# Altium PCB PCB_TestBoard.PcbDoc (part 1 of 2)
Units mil, origin at the board's own origin, x right, y up, seen from the top; angles counter-clockwise.
Board outline 3740.16 x 3346.46 mil, 2 copper layers (Top Layer, Bottom Layer); 100 components, 97 nets, 452 pads, 102 vias.
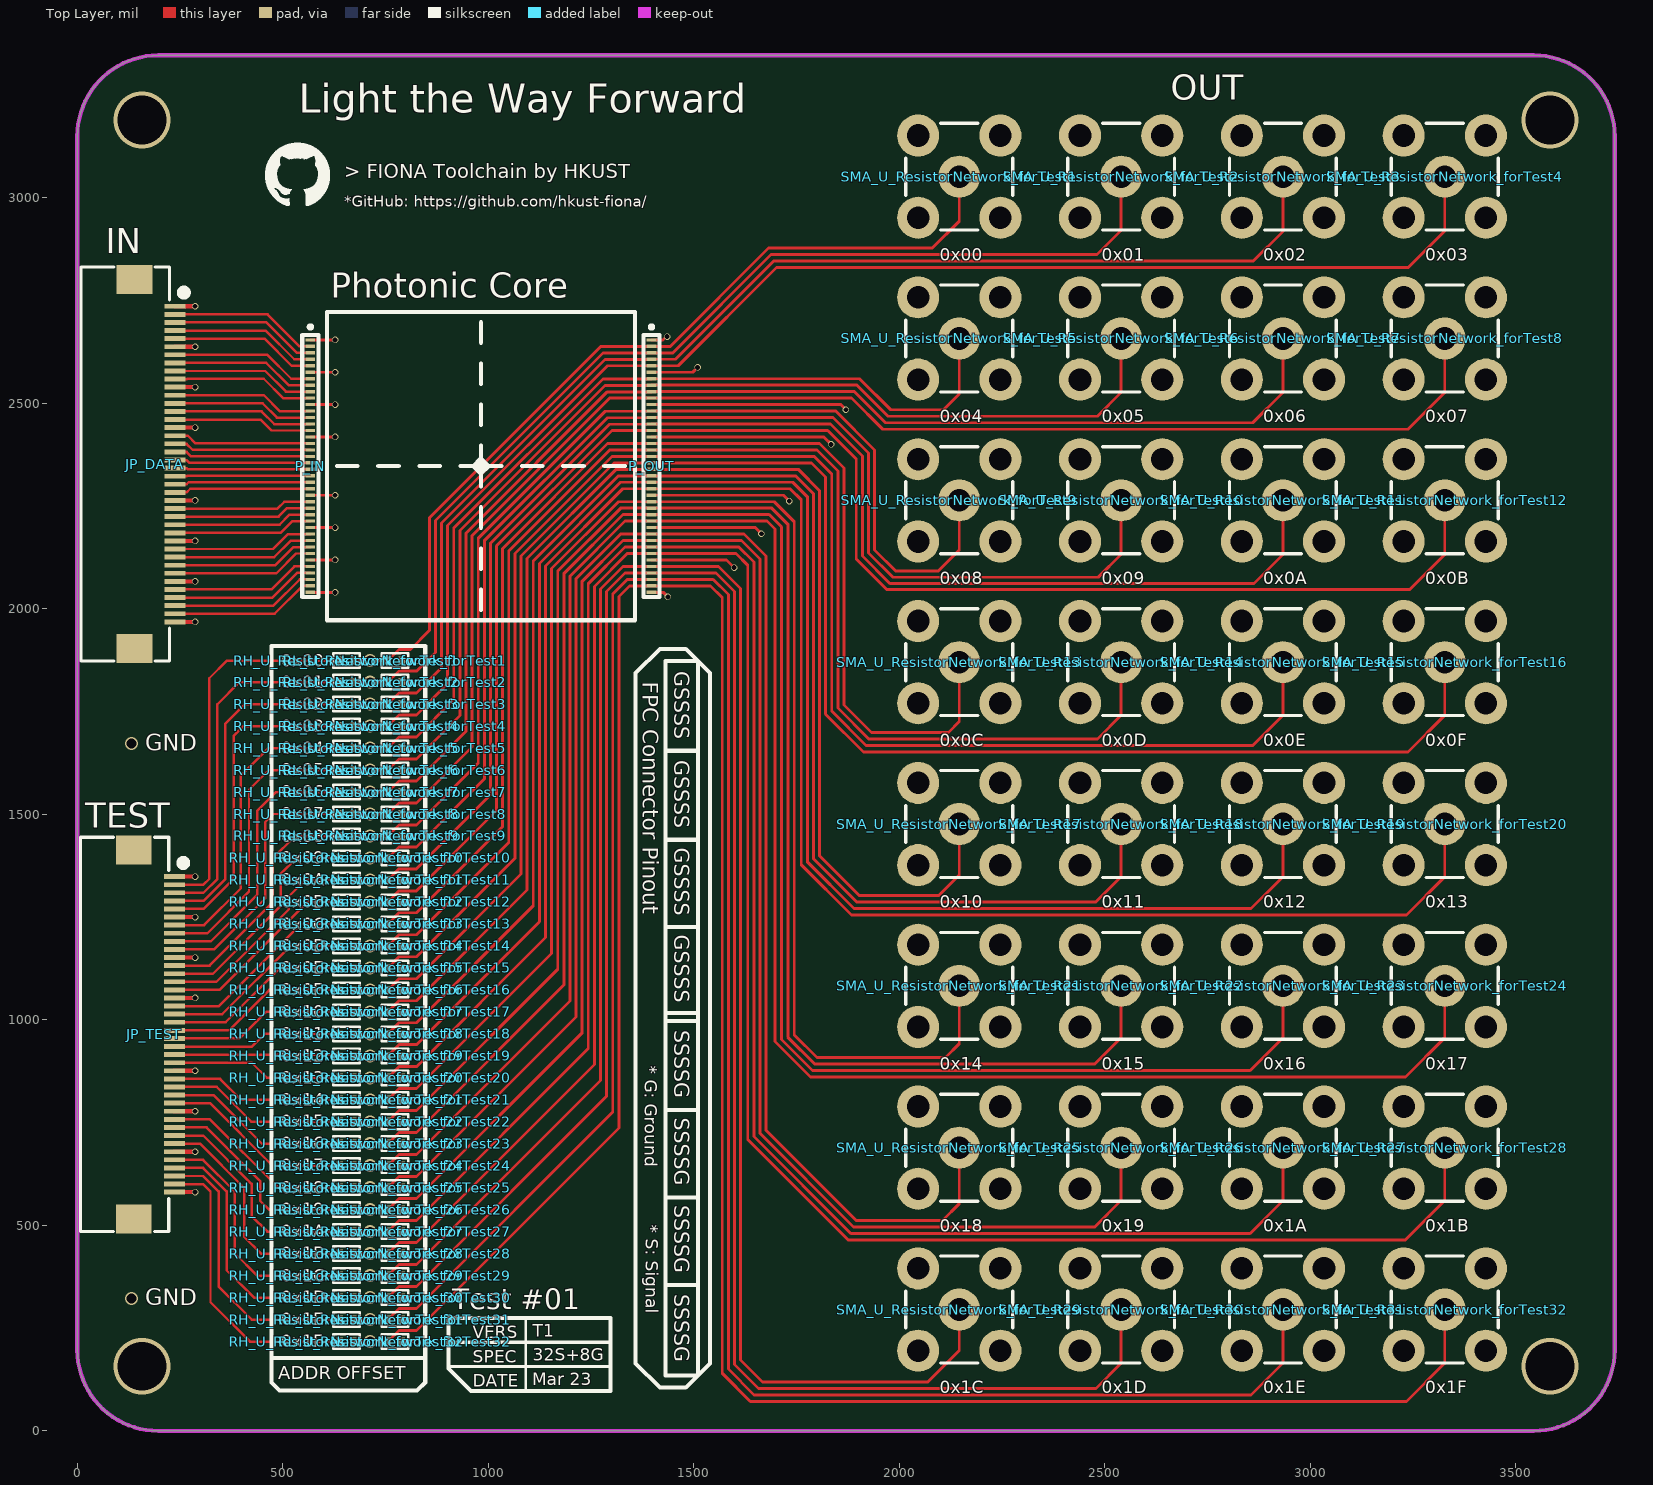
[diagram p0: Top Layer view]
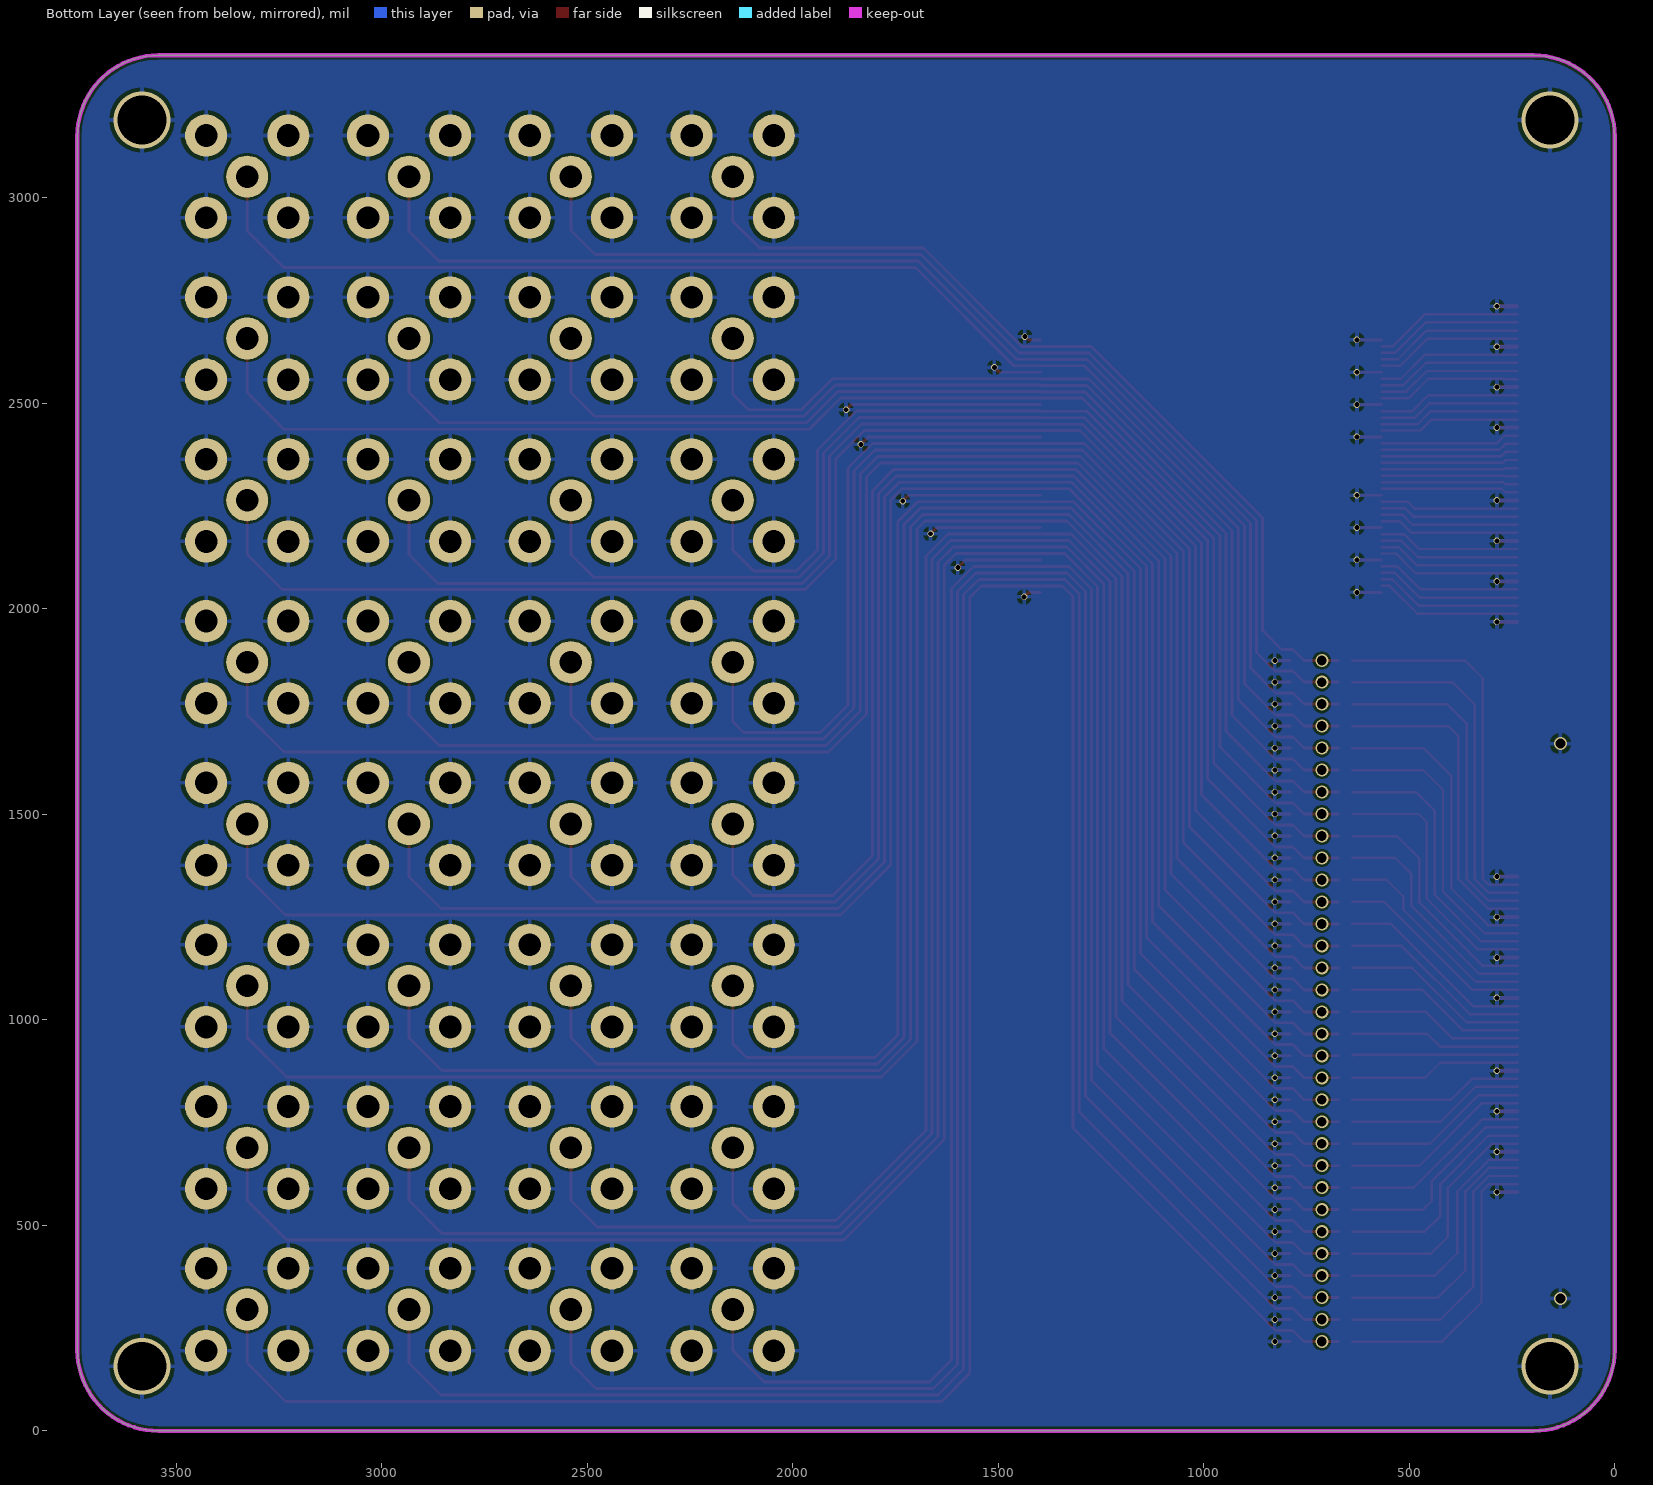
[diagram p1: Bottom Layer view, seen from below]
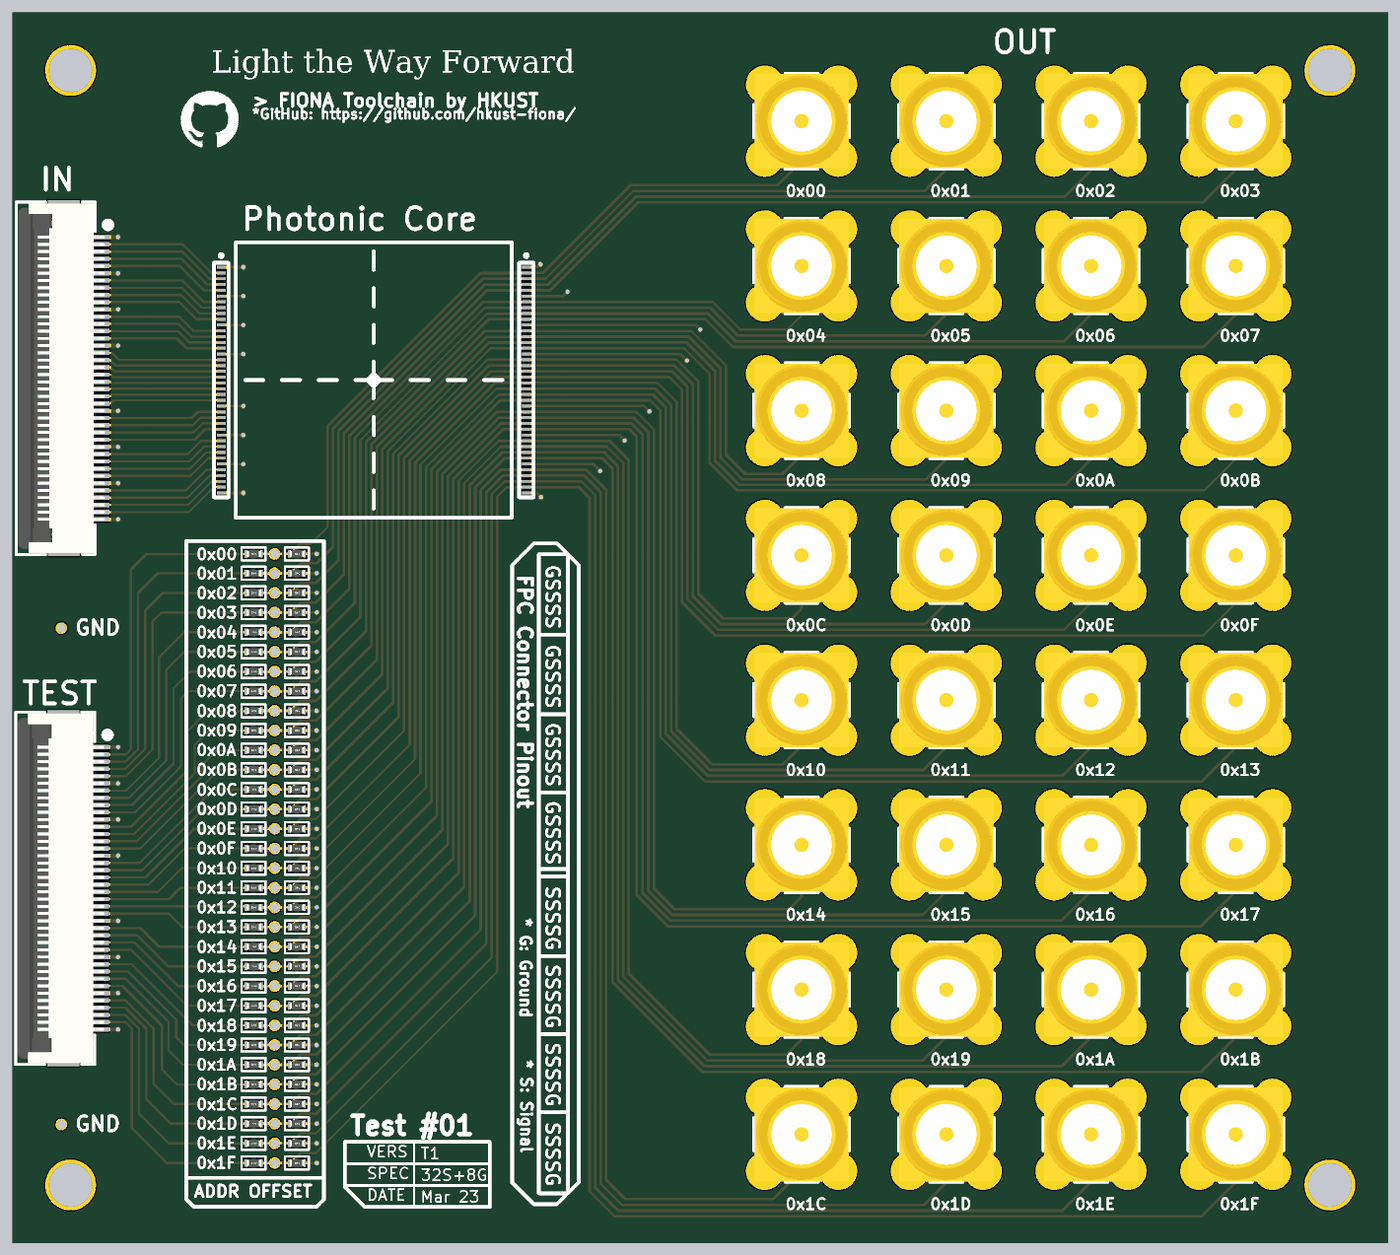
[diagram p3: 3D render of the assembled board from above, using the file's embedded part models]

## Layer stack, top to bottom
Top Solder: solder mask 0.4, Solder Resist, Dk 3.5
Top Layer: signal copper 1.4
Dielectric 1: dielectric 12.6, FR-4, Dk 4.8
Bottom Layer: signal copper 1.4
Bottom Solder: solder mask 0.4, Solder Resist, Dk 3.5

## Board outline
0,196.85 ccw(c196.85,196.85) 196.85,0 3543.31,0 ccw(c3543.31,196.85) 3740.16,196.85 3740.16,3149.61 ccw(c3543.31,3149.61) 3543.31,3346.46 3346.46,3346.46 196.85,3346.46 ccw(c196.85,3149.61) 0,3149.61

## Design rules (kind name [scope] priority, off if disabled: settings)
Clearance Clearance_DataIn [InNetClass('DataIn') vs InNetClass('DataIn')] p1: gap=7.87 ignorepadtopadclearanceinfootprint=FALSE
Clearance Clearance_TestIn [InNetClass('TestIn[1..32]') vs InNetClass('TestIn[1..32]')] p2: gap=7.87 ignorepadtopadclearanceinfootprint=FALSE
Clearance Clearance_Out [InNetClass('Out[1..32]') vs InNetClass('Out[1..32]')] p3: gap=7.87 ignorepadtopadclearanceinfootprint=FALSE
Clearance [All] p4: gap=6 ignorepadtopadclearanceinfootprint=FALSE
HoleSize [All] p1: absolutevalues=TRUE maxlimit=248.03 minlimit=11.81 maxpercent=80.000 minpercent=20.000
PolygonConnect [All] p1: connectstyle=Relief reliefconductorwidth=10 reliefentries=4 polygonreliefangle="90 Angle" airgapwidth=10
RoutingLayers RoutingLayers_DataIn [InNetClass('DataIn')] p1: top layer_v5=TRUE bottom layer_v5=FALSE
RoutingLayers RoutingLayers_TestIn [InNetClass('TestIn[1..32]')] p2: top layer_v5=TRUE bottom layer_v5=FALSE
RoutingLayers [All] p3: top layer_v5=TRUE bottom layer_v5=TRUE
RoutingVias [All] p1: holewidth=11.81 width=15.75 viastyle="Through Hole" minholewidth=11.81 minwidth=15.75 maxholewidth=236.22 maxwidth=236.22
SolderMaskExpansion [All] p1: expansion=4 istentingtop=FALSE
Width Width_DataIn [InNetClass('DataIn')] p1: maxlimit=6 minlimit=6 preferedwidth=6
Width Width_TestIn [InNetClass('TestIn[1..32]')] p2: maxlimit=6 minlimit=6 preferedwidth=6
Width [All] p3: maxlimit=10 minlimit=7 preferedwidth=7
28 further rules are at their usual default settings.

## Classes and differential pairs
net class DataIn: DataIn1 DataIn2 DataIn3 DataIn4 DataIn5 DataIn6 DataIn7 DataIn8 DataIn9 DataIn10 DataIn11 DataIn12 DataIn13 DataIn14 DataIn15 DataIn16 DataIn17 DataIn18 DataIn19 DataIn20 DataIn21 DataIn22 DataIn23 DataIn24 DataIn25 DataIn26 DataIn27 DataIn28 DataIn29 DataIn30 DataIn31 DataIn32
channel class ResistorNetwork_forTest: U_ResistorNetwork_forTest1 U_ResistorNetwork_forTest2 U_ResistorNetwork_forTest3 U_ResistorNetwork_forTest4 U_ResistorNetwork_forTest5 U_ResistorNetwork_forTest6 U_ResistorNetwork_forTest7 U_ResistorNetwork_forTest8 U_ResistorNetwork_forTest9 U_ResistorNetwork_forTest10 U_ResistorNetwork_forTest11 U_ResistorNetwork_forTest12 U_ResistorNetwork_forTest13 U_ResistorNetwork_forTest14 U_ResistorNetwork_forTest15 U_ResistorNetwork_forTest16 U_ResistorNetwork_forTest17 U_ResistorNetwork_forTest18 U_ResistorNetwork_forTest19 U_ResistorNetwork_forTest20 U_ResistorNetwork_forTest21 U_ResistorNetwork_forTest22 U_ResistorNetwork_forTest23 U_ResistorNetwork_forTest24 U_ResistorNetwork_forTest25 U_ResistorNetwork_forTest26 U_ResistorNetwork_forTest27 U_ResistorNetwork_forTest28 U_ResistorNetwork_forTest29 U_ResistorNetwork_forTest30 U_ResistorNetwork_forTest31 U_ResistorNetwork_forTest32
net class TestIn[1..32]: TestIn1 TestIn2 TestIn3 TestIn4 TestIn5 TestIn6 TestIn7 TestIn8 TestIn9 TestIn10 TestIn11 TestIn12 TestIn13 TestIn14 TestIn15 TestIn16 TestIn17 TestIn18 TestIn19 TestIn20 TestIn21 TestIn22 TestIn23 TestIn24 TestIn25 TestIn26 TestIn27 TestIn28 TestIn29 TestIn30 TestIn31 TestIn32
net class Out[1..32]: Out1 Out2 Out3 Out4 Out5 Out6 Out7 Out8 Out9 Out10 Out11 Out12 Out13 Out14 Out15 Out16 Out17 Out18 Out19 Out20 Out21 Out22 Out23 Out24 Out25 Out26 Out27 Out28 Out29 Out30 Out31 Out32
component class U_ResistorNetwork_forTest32: RH_U_ResistorNetwork_forTest32 RL_U_ResistorNetwork_forTest32 SMA_U_ResistorNetwork_forTest32
component class U_ResistorNetwork_forTest31: RH_U_ResistorNetwork_forTest31 RL_U_ResistorNetwork_forTest31 SMA_U_ResistorNetwork_forTest31
component class U_ResistorNetwork_forTest30: RH_U_ResistorNetwork_forTest30 RL_U_ResistorNetwork_forTest30 SMA_U_ResistorNetwork_forTest30
component class U_ResistorNetwork_forTest29: RH_U_ResistorNetwork_forTest29 RL_U_ResistorNetwork_forTest29 SMA_U_ResistorNetwork_forTest29
component class U_ResistorNetwork_forTest28: RH_U_ResistorNetwork_forTest28 RL_U_ResistorNetwork_forTest28 SMA_U_ResistorNetwork_forTest28
component class U_ResistorNetwork_forTest27: RH_U_ResistorNetwork_forTest27 RL_U_ResistorNetwork_forTest27 SMA_U_ResistorNetwork_forTest27
component class U_ResistorNetwork_forTest26: RH_U_ResistorNetwork_forTest26 RL_U_ResistorNetwork_forTest26 SMA_U_ResistorNetwork_forTest26
component class U_ResistorNetwork_forTest25: RH_U_ResistorNetwork_forTest25 RL_U_ResistorNetwork_forTest25 SMA_U_ResistorNetwork_forTest25
component class U_ResistorNetwork_forTest24: RH_U_ResistorNetwork_forTest24 RL_U_ResistorNetwork_forTest24 SMA_U_ResistorNetwork_forTest24
component class U_ResistorNetwork_forTest23: RH_U_ResistorNetwork_forTest23 RL_U_ResistorNetwork_forTest23 SMA_U_ResistorNetwork_forTest23
component class U_ResistorNetwork_forTest22: RH_U_ResistorNetwork_forTest22 RL_U_ResistorNetwork_forTest22 SMA_U_ResistorNetwork_forTest22
component class U_ResistorNetwork_forTest21: RH_U_ResistorNetwork_forTest21 RL_U_ResistorNetwork_forTest21 SMA_U_ResistorNetwork_forTest21
component class U_ResistorNetwork_forTest20: RH_U_ResistorNetwork_forTest20 RL_U_ResistorNetwork_forTest20 SMA_U_ResistorNetwork_forTest20
component class U_ResistorNetwork_forTest19: RH_U_ResistorNetwork_forTest19 RL_U_ResistorNetwork_forTest19 SMA_U_ResistorNetwork_forTest19
component class U_ResistorNetwork_forTest18: RH_U_ResistorNetwork_forTest18 RL_U_ResistorNetwork_forTest18 SMA_U_ResistorNetwork_forTest18
component class U_ResistorNetwork_forTest17: RH_U_ResistorNetwork_forTest17 RL_U_ResistorNetwork_forTest17 SMA_U_ResistorNetwork_forTest17
component class U_ResistorNetwork_forTest16: RH_U_ResistorNetwork_forTest16 RL_U_ResistorNetwork_forTest16 SMA_U_ResistorNetwork_forTest16
component class U_ResistorNetwork_forTest15: RH_U_ResistorNetwork_forTest15 RL_U_ResistorNetwork_forTest15 SMA_U_ResistorNetwork_forTest15
component class U_ResistorNetwork_forTest14: RH_U_ResistorNetwork_forTest14 RL_U_ResistorNetwork_forTest14 SMA_U_ResistorNetwork_forTest14
component class U_ResistorNetwork_forTest13: RH_U_ResistorNetwork_forTest13 RL_U_ResistorNetwork_forTest13 SMA_U_ResistorNetwork_forTest13
component class U_ResistorNetwork_forTest12: RH_U_ResistorNetwork_forTest12 RL_U_ResistorNetwork_forTest12 SMA_U_ResistorNetwork_forTest12
component class U_ResistorNetwork_forTest11: RH_U_ResistorNetwork_forTest11 RL_U_ResistorNetwork_forTest11 SMA_U_ResistorNetwork_forTest11
component class U_ResistorNetwork_forTest10: RH_U_ResistorNetwork_forTest10 RL_U_ResistorNetwork_forTest10 SMA_U_ResistorNetwork_forTest10
component class U_ResistorNetwork_forTest9: RH_U_ResistorNetwork_forTest9 RL_U_ResistorNetwork_forTest9 SMA_U_ResistorNetwork_forTest9
component class U_ResistorNetwork_forTest8: RH_U_ResistorNetwork_forTest8 RL_U_ResistorNetwork_forTest8 SMA_U_ResistorNetwork_forTest8
component class U_ResistorNetwork_forTest7: RH_U_ResistorNetwork_forTest7 RL_U_ResistorNetwork_forTest7 SMA_U_ResistorNetwork_forTest7
component class U_ResistorNetwork_forTest6: RH_U_ResistorNetwork_forTest6 RL_U_ResistorNetwork_forTest6 SMA_U_ResistorNetwork_forTest6
component class U_ResistorNetwork_forTest5: RH_U_ResistorNetwork_forTest5 RL_U_ResistorNetwork_forTest5 SMA_U_ResistorNetwork_forTest5
component class U_ResistorNetwork_forTest4: RH_U_ResistorNetwork_forTest4 RL_U_ResistorNetwork_forTest4 SMA_U_ResistorNetwork_forTest4
component class U_ResistorNetwork_forTest3: RH_U_ResistorNetwork_forTest3 RL_U_ResistorNetwork_forTest3 SMA_U_ResistorNetwork_forTest3
component class U_ResistorNetwork_forTest2: RH_U_ResistorNetwork_forTest2 RL_U_ResistorNetwork_forTest2 SMA_U_ResistorNetwork_forTest2
component class U_ResistorNetwork_forTest1: RH_U_ResistorNetwork_forTest1 RL_U_ResistorNetwork_forTest1 SMA_U_ResistorNetwork_forTest1
component class TrayBoard: JP_DATA JP_TEST P_IN P_OUT

## Components (designator, comment, footprint, x,y, rotation, side; value= is the part's Value field where it differs from the comment)
JP_DATA "FPC-0.5mm-40P" "FPC0.5 2H-WS-40P" 139.21,2352.05 r270 top
JP_TEST "FPC-0.5mm-40P" "FPC0.5 2H-WS-40P" 137.8,964.57 r270 top
P_IN "SMD 40P" SMD-40P-W0.2-H0.6-T0.4 567.09,2347.05 r270 top
P_OUT "SMD 40P" SMD-40P-W0.2-H0.6-T0.4 1397.09,2347.05 r270 top
RH_U_ResistorNetwork_forTest1 "5K" "R 0402_L" 656.22,1874.01 r180 top (schematic designator RH)
RH_U_ResistorNetwork_forTest2 "5K" "R 0402_L" 656.22,1821.53 r180 top (schematic designator RH)
RH_U_ResistorNetwork_forTest3 "5K" "R 0402_L" 656.22,1768.06 r180 top (schematic designator RH)
RH_U_ResistorNetwork_forTest4 "5K" "R 0402_L" 656.22,1714.58 r180 top (schematic designator RH)
RH_U_ResistorNetwork_forTest5 "5K" "R 0402_L" 656.22,1661.11 r180 top (schematic designator RH)
RH_U_ResistorNetwork_forTest6 "5K" "R 0402_L" 656.22,1607.63 r180 top (schematic designator RH)
RH_U_ResistorNetwork_forTest7 "5K" "R 0402_L" 656.22,1554.16 r180 top (schematic designator RH)
RH_U_ResistorNetwork_forTest8 "5K" "R 0402_L" 656.22,1500.69 r180 top (schematic designator RH)
RH_U_ResistorNetwork_forTest9 "5K" "R 0402_L" 656.22,1447.21 r180 top (schematic designator RH)
RH_U_ResistorNetwork_forTest10 "5K" "R 0402_L" 656.22,1393.74 r180 top (schematic designator RH)
RH_U_ResistorNetwork_forTest11 "5K" "R 0402_L" 656.22,1340.27 r180 top (schematic designator RH)
RH_U_ResistorNetwork_forTest12 "5K" "R 0402_L" 656.22,1286.79 r180 top (schematic designator RH)
RH_U_ResistorNetwork_forTest13 "5K" "R 0402_L" 656.22,1233.32 r180 top (schematic designator RH)
RH_U_ResistorNetwork_forTest14 "5K" "R 0402_L" 656.22,1179.84 r180 top (schematic designator RH)
RH_U_ResistorNetwork_forTest15 "5K" "R 0402_L" 656.22,1126.37 r180 top (schematic designator RH)
RH_U_ResistorNetwork_forTest16 "5K" "R 0402_L" 656.22,1072.9 r180 top (schematic designator RH)
RH_U_ResistorNetwork_forTest17 "5K" "R 0402_L" 656.22,1019.42 r180 top (schematic designator RH)
RH_U_ResistorNetwork_forTest18 "5K" "R 0402_L" 656.22,965.95 r180 top (schematic designator RH)
RH_U_ResistorNetwork_forTest19 "5K" "R 0402_L" 656.22,912.47 r180 top (schematic designator RH)
RH_U_ResistorNetwork_forTest20 "5K" "R 0402_L" 656.22,859 r180 top (schematic designator RH)
RH_U_ResistorNetwork_forTest21 "5K" "R 0402_L" 656.22,805.53 r180 top (schematic designator RH)
RH_U_ResistorNetwork_forTest22 "5K" "R 0402_L" 656.22,752.05 r180 top (schematic designator RH)
RH_U_ResistorNetwork_forTest23 "5K" "R 0402_L" 656.22,698.58 r180 top (schematic designator RH)
RH_U_ResistorNetwork_forTest24 "5K" "R 0402_L" 656.22,645.1 r180 top (schematic designator RH)
RH_U_ResistorNetwork_forTest25 "5K" "R 0402_L" 656.22,591.63 r180 top (schematic designator RH)
RH_U_ResistorNetwork_forTest26 "5K" "R 0402_L" 656.22,538.16 r180 top (schematic designator RH)
RH_U_ResistorNetwork_forTest27 "5K" "R 0402_L" 656.22,484.68 r180 top (schematic designator RH)
RH_U_ResistorNetwork_forTest28 "5K" "R 0402_L" 656.22,431.21 r180 top (schematic designator RH)
RH_U_ResistorNetwork_forTest29 "5K" "R 0402_L" 656.22,377.74 r180 top (schematic designator RH)
RH_U_ResistorNetwork_forTest30 "5K" "R 0402_L" 656.22,324.26 r180 top (schematic designator RH)
RH_U_ResistorNetwork_forTest31 "5K" "R 0402_L" 656.22,270.79 r180 top (schematic designator RH)
RH_U_ResistorNetwork_forTest32 "5K" "R 0402_L" 656.22,217.31 r180 top (schematic designator RH)
RL_U_ResistorNetwork_forTest1 "1K" "R 0402_L" 773.62,1874.01 r180 top (schematic designator RL)
RL_U_ResistorNetwork_forTest2 "1K" "R 0402_L" 773.62,1821.53 r180 top (schematic designator RL)
RL_U_ResistorNetwork_forTest3 "1K" "R 0402_L" 773.62,1768.06 r180 top (schematic designator RL)
RL_U_ResistorNetwork_forTest4 "1K" "R 0402_L" 773.62,1714.58 r180 top (schematic designator RL)
RL_U_ResistorNetwork_forTest5 "1K" "R 0402_L" 773.62,1661.11 r180 top (schematic designator RL)
RL_U_ResistorNetwork_forTest6 "1K" "R 0402_L" 773.62,1607.64 r180 top (schematic designator RL)
RL_U_ResistorNetwork_forTest7 "1K" "R 0402_L" 773.62,1554.16 r180 top (schematic designator RL)
RL_U_ResistorNetwork_forTest8 "1K" "R 0402_L" 773.62,1500.69 r180 top (schematic designator RL)
RL_U_ResistorNetwork_forTest9 "1K" "R 0402_L" 773.62,1447.21 r180 top (schematic designator RL)
RL_U_ResistorNetwork_forTest10 "1K" "R 0402_L" 773.62,1393.74 r180 top (schematic designator RL)
RL_U_ResistorNetwork_forTest11 "1K" "R 0402_L" 773.62,1340.27 r180 top (schematic designator RL)
RL_U_ResistorNetwork_forTest12 "1K" "R 0402_L" 773.62,1286.79 r180 top (schematic designator RL)
RL_U_ResistorNetwork_forTest13 "1K" "R 0402_L" 773.62,1233.32 r180 top (schematic designator RL)
RL_U_ResistorNetwork_forTest14 "1K" "R 0402_L" 773.62,1179.84 r180 top (schematic designator RL)
RL_U_ResistorNetwork_forTest15 "1K" "R 0402_L" 773.62,1126.37 r180 top (schematic designator RL)
RL_U_ResistorNetwork_forTest16 "1K" "R 0402_L" 773.62,1072.9 r180 top (schematic designator RL)
RL_U_ResistorNetwork_forTest17 "1K" "R 0402_L" 773.62,1019.42 r180 top (schematic designator RL)
RL_U_ResistorNetwork_forTest18 "1K" "R 0402_L" 773.62,965.95 r180 top (schematic designator RL)
RL_U_ResistorNetwork_forTest19 "1K" "R 0402_L" 773.62,912.47 r180 top (schematic designator RL)
RL_U_ResistorNetwork_forTest20 "1K" "R 0402_L" 773.62,859 r180 top (schematic designator RL)
RL_U_ResistorNetwork_forTest21 "1K" "R 0402_L" 773.62,805.53 r180 top (schematic designator RL)
RL_U_ResistorNetwork_forTest22 "1K" "R 0402_L" 773.62,752.05 r180 top (schematic designator RL)
RL_U_ResistorNetwork_forTest23 "1K" "R 0402_L" 773.62,698.58 r180 top (schematic designator RL)
RL_U_ResistorNetwork_forTest24 "1K" "R 0402_L" 773.62,645.11 r180 top (schematic designator RL)
RL_U_ResistorNetwork_forTest25 "1K" "R 0402_L" 773.62,591.63 r180 top (schematic designator RL)
RL_U_ResistorNetwork_forTest26 "1K" "R 0402_L" 773.62,538.16 r180 top (schematic designator RL)
RL_U_ResistorNetwork_forTest27 "1K" "R 0402_L" 773.62,484.68 r180 top (schematic designator RL)
RL_U_ResistorNetwork_forTest28 "1K" "R 0402_L" 773.62,431.21 r180 top (schematic designator RL)
RL_U_ResistorNetwork_forTest29 "1K" "R 0402_L" 773.62,377.74 r180 top (schematic designator RL)
RL_U_ResistorNetwork_forTest30 "1K" "R 0402_L" 773.62,324.26 r180 top (schematic designator RL)
RL_U_ResistorNetwork_forTest31 "1K" "R 0402_L" 773.62,270.79 r180 top (schematic designator RL)
RL_U_ResistorNetwork_forTest32 "1K" "R 0402_L" 773.62,217.31 r180 top (schematic designator RL)
SMA_U_ResistorNetwork_forTest1 "SMA RF 立式" SMA-KE-LI 2145.67,3051.18 r270 top (schematic designator SMA)
SMA_U_ResistorNetwork_forTest2 "SMA RF 立式" SMA-KE-LI 2539.37,3051.18 r270 top (schematic designator SMA)
SMA_U_ResistorNetwork_forTest3 "SMA RF 立式" SMA-KE-LI 2933.07,3051.18 r270 top (schematic designator SMA)
SMA_U_ResistorNetwork_forTest4 "SMA RF 立式" SMA-KE-LI 3326.77,3051.18 r270 top (schematic designator SMA)
SMA_U_ResistorNetwork_forTest5 "SMA RF 立式" SMA-KE-LI 2145.67,2657.48 r270 top (schematic designator SMA)
SMA_U_ResistorNetwork_forTest6 "SMA RF 立式" SMA-KE-LI 2539.37,2657.48 r270 top (schematic designator SMA)
SMA_U_ResistorNetwork_forTest7 "SMA RF 立式" SMA-KE-LI 2933.07,2657.48 r270 top (schematic designator SMA)
SMA_U_ResistorNetwork_forTest8 "SMA RF 立式" SMA-KE-LI 3326.77,2657.48 r270 top (schematic designator SMA)
SMA_U_ResistorNetwork_forTest9 "SMA RF 立式" SMA-KE-LI 2145.67,2263.78 r270 top (schematic designator SMA)
SMA_U_ResistorNetwork_forTest10 "SMA RF 立式" SMA-KE-LI 2539.37,2263.78 r270 top (schematic designator SMA)
SMA_U_ResistorNetwork_forTest11 "SMA RF 立式" SMA-KE-LI 2933.07,2263.78 r270 top (schematic designator SMA)
SMA_U_ResistorNetwork_forTest12 "SMA RF 立式" SMA-KE-LI 3326.77,2263.78 r270 top (schematic designator SMA)
SMA_U_ResistorNetwork_forTest13 "SMA RF 立式" SMA-KE-LI 2145.67,1870.08 r270 top (schematic designator SMA)
SMA_U_ResistorNetwork_forTest14 "SMA RF 立式" SMA-KE-LI 2539.37,1870.08 r270 top (schematic designator SMA)
SMA_U_ResistorNetwork_forTest15 "SMA RF 立式" SMA-KE-LI 2933.07,1870.08 r270 top (schematic designator SMA)
SMA_U_ResistorNetwork_forTest16 "SMA RF 立式" SMA-KE-LI 3326.77,1870.08 r270 top (schematic designator SMA)
SMA_U_ResistorNetwork_forTest17 "SMA RF 立式" SMA-KE-LI 2145.67,1476.38 r270 top (schematic designator SMA)
SMA_U_ResistorNetwork_forTest18 "SMA RF 立式" SMA-KE-LI 2539.37,1476.38 r270 top (schematic designator SMA)
SMA_U_ResistorNetwork_forTest19 "SMA RF 立式" SMA-KE-LI 2933.07,1476.38 r270 top (schematic designator SMA)
SMA_U_ResistorNetwork_forTest20 "SMA RF 立式" SMA-KE-LI 3326.77,1476.38 r270 top (schematic designator SMA)
SMA_U_ResistorNetwork_forTest21 "SMA RF 立式" SMA-KE-LI 2145.67,1082.68 r270 top (schematic designator SMA)
SMA_U_ResistorNetwork_forTest22 "SMA RF 立式" SMA-KE-LI 2539.37,1082.68 r270 top (schematic designator SMA)
SMA_U_ResistorNetwork_forTest23 "SMA RF 立式" SMA-KE-LI 2933.07,1082.68 r270 top (schematic designator SMA)
SMA_U_ResistorNetwork_forTest24 "SMA RF 立式" SMA-KE-LI 3326.77,1082.68 r270 top (schematic designator SMA)
SMA_U_ResistorNetwork_forTest25 "SMA RF 立式" SMA-KE-LI 2145.67,688.98 r270 top (schematic designator SMA)
SMA_U_ResistorNetwork_forTest26 "SMA RF 立式" SMA-KE-LI 2539.37,688.98 r270 top (schematic designator SMA)
SMA_U_ResistorNetwork_forTest27 "SMA RF 立式" SMA-KE-LI 2933.07,688.98 r270 top (schematic designator SMA)
SMA_U_ResistorNetwork_forTest28 "SMA RF 立式" SMA-KE-LI 3326.77,688.98 r270 top (schematic designator SMA)
SMA_U_ResistorNetwork_forTest29 "SMA RF 立式" SMA-KE-LI 2145.67,295.28 r270 top (schematic designator SMA)
SMA_U_ResistorNetwork_forTest30 "SMA RF 立式" SMA-KE-LI 2539.37,295.28 r270 top (schematic designator SMA)
SMA_U_ResistorNetwork_forTest31 "SMA RF 立式" SMA-KE-LI 2933.07,295.28 r270 top (schematic designator SMA)
SMA_U_ResistorNetwork_forTest32 "SMA RF 立式" SMA-KE-LI 3326.77,295.28 r270 top (schematic designator SMA)

## Footprints (in the part's own frame and the unit in brackets; to place one, negate y for a bottom-side part, rotate by r counter-clockwise, add the part's x,y. Pads: shape width x height; smd on the part's side, far side on the other; paste and mask are expansions set on the pad)
"FPC0.5 2H-WS-40P" [mm] "长：24.2mm，宽：5.2mm，高：2mm 淘宝ID:黄晶宝石   店铺网址:https://shop463601444.taobao.com"
  rect 1.8x2.2 smd: 0(-11.4,0) 0(11.4,0)
  rect 0.3x1.3 smd: 1(-9.75,2.497) 2(-9.25,2.497) 3(-8.75,2.497) 4(-8.25,2.497) 5(-7.75,2.497) 6(-7.25,2.497) 7(-6.75,2.497) 8(-6.25,2.497) 9(-5.75,2.497) 10(-5.25,2.497) 11(-4.75,2.497) 12(-4.25,2.497) 13(-3.75,2.497) 14(-3.25,2.497) 15(-2.75,2.497) 16(-2.25,2.497) 17(-1.75,2.497) 18(-1.25,2.497) 19(-0.75,2.497) 20(-0.25,2.497) 21(0.25,2.497) 22(0.75,2.497) 23(1.25,2.497) 24(1.75,2.497) 25(2.25,2.497) 26(2.75,2.497) 27(3.25,2.497) 28(3.75,2.497) 29(4.25,2.497) 30(4.75,2.497) 31(5.25,2.497) 32(5.75,2.497) 33(6.25,2.497) 34(6.75,2.497) 35(7.25,2.497) 36(7.75,2.497) 37(8.25,2.497) 38(8.75,2.497) 39(9.25,2.497) 40(9.75,2.497)
  silkscreen extent -12.17,-3.3 12.17,3.23, body extent -12.1,-3.15 12.1,2.85, height 2
"R 0402_L" [mm] "1/16W贴片电阻     淘宝ID:黄晶宝石"
  rect 0.4x0.5 smd: 1(-0.4,0) 2(0.45,0)
  silkscreen extent -0.8,-0.45 0.85,0.45, body extent -0.5,-0.25 0.5,0.25, height 0.3
SMA-KE-LI [mm] "SMA 立式直插射频天线座     淘宝ID:黄晶宝石"
  round 2.6 hole 1.4: 1(0,0) 2(-2.54,-2.54) 2(2.54,-2.54) 3(-2.54,2.54) 3(2.54,2.54)
  silkscreen extent -3.3,-3.3 3.3,3.3, body extent -3.25,-3.25 3.25,3.25, height 10.35
SMD-40P-W0.2-H0.6-T0.4 [mm] "SMD 40PIN; Width: 0.2mm, Height: 0.6m, Period: 0.4mm."
  rect 0.2x0.6 smd: 1(-7.8,0) 2(-7.4,0) 3(-7,0) 4(-6.6,0) 5(-6.2,0) 6(-5.8,0) 7(-5.4,0) 8(-5,0) 9(-4.6,0) 10(-4.2,0) 11(-3.8,0) 12(-3.4,0) 13(-3,0) 14(-2.6,0) 15(-2.2,0) 16(-1.8,0) 17(-1.4,0) 18(-1,0) 19(-0.6,0) 20(-0.2,0) 21(0.2,0) 22(0.6,0) 23(1,0) 24(1.4,0) 25(1.8,0) 26(2.2,0) 27(2.6,0) 28(3,0) 29(3.4,0) 30(3.8,0) 31(4.2,0) 32(4.6,0) 33(5,0) 34(5.4,0) 35(5.8,0) 36(6.2,0) 37(6.6,0) 38(7,0) 39(7.4,0) 40(7.8,0)
  silkscreen extent -8.7,-0.5 8.1,0.5

## Part data
JP_DATA JP_TEST: "FPC Connector 0.5mm 40PIN"
P_IN P_OUT: "SMD Pad for Chip Bonding (40 PIN)."
RH_U_ResistorNetwork_forTest1 RH_U_ResistorNetwork_forTest2 RH_U_ResistorNetwork_forTest3 RH_U_ResistorNetwork_forTest4 RH_U_ResistorNetwork_forTest5 RH_U_ResistorNetwork_forTest6 RH_U_ResistorNetwork_forTest7 RH_U_ResistorNetwork_forTest8 RH_U_ResistorNetwork_forTest9 RH_U_ResistorNetwork_forTest10 RH_U_ResistorNetwork_forTest11 RH_U_ResistorNetwork_forTest12 RH_U_ResistorNetwork_forTest13 RH_U_ResistorNetwork_forTest14 RH_U_ResistorNetwork_forTest15 RH_U_ResistorNetwork_forTest16 RH_U_ResistorNetwork_forTest17 RH_U_ResistorNetwork_forTest18 RH_U_ResistorNetwork_forTest19 RH_U_ResistorNetwork_forTest20 RH_U_ResistorNetwork_forTest21 RH_U_ResistorNetwork_forTest22 RH_U_ResistorNetwork_forTest23 RH_U_ResistorNetwork_forTest24 RH_U_ResistorNetwork_forTest25 RH_U_ResistorNetwork_forTest26 RH_U_ResistorNetwork_forTest27 RH_U_ResistorNetwork_forTest28 RH_U_ResistorNetwork_forTest29 RH_U_ResistorNetwork_forTest30 RH_U_ResistorNetwork_forTest31 RH_U_ResistorNetwork_forTest32: library part R, "贴片电阻 0.1% / C3202451", BOM名称=贴片电阻, 封装库来自淘宝卖家 ID：黄晶宝石=其他店铺购入均为盗版，不享受售后技术支持服务，请立即申请退款, 版权归属="来自淘宝 ID：黄晶宝石", 联系售后=https://shop463601444.taobao.com
RL_U_ResistorNetwork_forTest1 RL_U_ResistorNetwork_forTest2 RL_U_ResistorNetwork_forTest3 RL_U_ResistorNetwork_forTest4 RL_U_ResistorNetwork_forTest5 RL_U_ResistorNetwork_forTest6 RL_U_ResistorNetwork_forTest7 RL_U_ResistorNetwork_forTest8 RL_U_ResistorNetwork_forTest9 RL_U_ResistorNetwork_forTest10 RL_U_ResistorNetwork_forTest11 RL_U_ResistorNetwork_forTest12 RL_U_ResistorNetwork_forTest13 RL_U_ResistorNetwork_forTest14 RL_U_ResistorNetwork_forTest15 RL_U_ResistorNetwork_forTest16 RL_U_ResistorNetwork_forTest17 RL_U_ResistorNetwork_forTest18 RL_U_ResistorNetwork_forTest19 RL_U_ResistorNetwork_forTest20 RL_U_ResistorNetwork_forTest21 RL_U_ResistorNetwork_forTest22 RL_U_ResistorNetwork_forTest23 RL_U_ResistorNetwork_forTest24 RL_U_ResistorNetwork_forTest25 RL_U_ResistorNetwork_forTest26 RL_U_ResistorNetwork_forTest27 RL_U_ResistorNetwork_forTest28 RL_U_ResistorNetwork_forTest29 RL_U_ResistorNetwork_forTest30 RL_U_ResistorNetwork_forTest31 RL_U_ResistorNetwork_forTest32: library part R, "贴片电阻 0.1%", BOM名称=贴片电阻, 封装库来自淘宝卖家 ID：黄晶宝石=其他店铺购入均为盗版，不享受售后技术支持服务，请立即申请退款, 版权归属="来自淘宝 ID：黄晶宝石", 联系售后=https://shop463601444.taobao.com
SMA_U_ResistorNetwork_forTest1 SMA_U_ResistorNetwork_forTest2 SMA_U_ResistorNetwork_forTest3 SMA_U_ResistorNetwork_forTest4 SMA_U_ResistorNetwork_forTest5 SMA_U_ResistorNetwork_forTest6 SMA_U_ResistorNetwork_forTest7 SMA_U_ResistorNetwork_forTest8 SMA_U_ResistorNetwork_forTest9 SMA_U_ResistorNetwork_forTest10 SMA_U_ResistorNetwork_forTest11 SMA_U_ResistorNetwork_forTest12 SMA_U_ResistorNetwork_forTest13 SMA_U_ResistorNetwork_forTest14 SMA_U_ResistorNetwork_forTest15 SMA_U_ResistorNetwork_forTest16 SMA_U_ResistorNetwork_forTest17 SMA_U_ResistorNetwork_forTest18 SMA_U_ResistorNetwork_forTest19 SMA_U_ResistorNetwork_forTest20 SMA_U_ResistorNetwork_forTest21 SMA_U_ResistorNetwork_forTest22 SMA_U_ResistorNetwork_forTest23 SMA_U_ResistorNetwork_forTest24 SMA_U_ResistorNetwork_forTest25 SMA_U_ResistorNetwork_forTest26 SMA_U_ResistorNetwork_forTest27 SMA_U_ResistorNetwork_forTest28 SMA_U_ResistorNetwork_forTest29 SMA_U_ResistorNetwork_forTest30 SMA_U_ResistorNetwork_forTest31 SMA_U_ResistorNetwork_forTest32: library part SMA, BOM名称=SMA-2.4G射频天线接口, 唯一出售店铺网址=https://shop463601444.taobao.com, 版权归属="封装库来自淘宝 ID：黄晶宝石"

## Via types
v1: diameter 15.75, hole 11.81, Top Layer to Bottom Layer, tented both sides, 64 vias
v2: diameter 31.5, hole 23.62, Top Layer to Bottom Layer, 34 vias
v3: diameter 137.8, hole 118.11, Top Layer to Bottom Layer, 4 vias

## Nets (pads, with @x,y where several pads share a name; then routed paths per layer and width w, separated by ;. In a path a pad name is that pad's centre, name@x,y a point inside that pad or via, vN(x,y) a via of type N, cw(c..) or ccw(c..) an arc to the next point about the centre after c; other vN are vias at no path point)
DataIn1: JP_DATA.2 P_IN.2 | length 361.8
  Top Layer w6: JP_DATA.2@237.52,2716.22 462.91,2716.22 540.75,2638.39 P_IN.2@567.09,2638.39
DataIn2: JP_DATA.3 P_IN.3 | length 360.2
  Top Layer w6: JP_DATA.3@237.52,2696.54 460.33,2696.54 534.23,2622.64 P_IN.3@567.09,2622.64
DataIn3: JP_DATA.4 P_IN.4 | length 358.5
  Top Layer w6: JP_DATA.4@237.52,2676.85 457.74,2676.85 527.7,2606.89 P_IN.4@567.09,2606.89
DataIn4: JP_DATA.5 P_IN.5 | length 356.9
  Top Layer w6: JP_DATA.5@237.52,2657.17 455.16,2657.17 521.18,2591.14 P_IN.5@567.09,2591.14
DataIn5: JP_DATA.7 P_IN.7 | length 353.7
  Top Layer w6: JP_DATA.7@237.52,2617.8 462.34,2617.8 520.49,2559.65 P_IN.7@567.09,2559.65
DataIn6: JP_DATA.8 P_IN.8 | length 352
  Top Layer w6: JP_DATA.8@237.52,2598.11 459.75,2598.11 513.97,2543.9 P_IN.8@567.09,2543.9
DataIn7: JP_DATA.9 P_IN.9 | length 350.4
  Top Layer w6: JP_DATA.9@237.52,2578.43 457.17,2578.43 507.44,2528.15 P_IN.9@567.09,2528.15
DataIn8: JP_DATA.10 P_IN.10 | length 349.5
  Top Layer w6: JP_DATA.10@237.52,2558.74 266.11,2558.74 267.01,2559.64 453.68,2559.64 500.92,2512.4 P_IN.10@567.09,2512.4
DataIn9: JP_DATA.12 P_IN.12 | length 345.5
  Top Layer w6: JP_DATA.12@237.52,2519.37 453.76,2519.37 492.23,2480.91 P_IN.12@567.09,2480.91
DataIn10: JP_DATA.13 P_IN.13 | length 343.9
  Top Layer w6: JP_DATA.13@237.52,2499.69 451.18,2499.69 485.71,2465.16 P_IN.13@567.09,2465.16
DataIn11: JP_DATA.14 P_IN.14 | length 342.2
  Top Layer w6: JP_DATA.14@237.52,2480 448.59,2480 479.18,2449.41 P_IN.14@567.09,2449.41
DataIn12: JP_DATA.15 P_IN.15 | length 340.6
  Top Layer w6: JP_DATA.15@237.52,2460.32 446.01,2460.32 472.66,2433.66 P_IN.15@567.09,2433.66
DataIn13: JP_DATA.17 P_IN.17 | length 337.3
  Top Layer w6: JP_DATA.17@237.52,2420.95 269.19,2420.95 287.97,2402.17 P_IN.17@567.09,2402.17
DataIn14: JP_DATA.18 P_IN.18 | length 335.7
  Top Layer w6: JP_DATA.18@237.52,2401.26 266.11,2401.26 280.95,2386.42 P_IN.18@567.09,2386.42
DataIn15: JP_DATA.19 P_IN.19 | length 334.1
  Top Layer w6: JP_DATA.19@237.52,2381.58 266.11,2381.58 277.01,2370.67 P_IN.19@567.09,2370.67
DataIn16: JP_DATA.20 P_IN.20 | length 332.5
  Top Layer w6: JP_DATA.20@237.52,2361.89 266.11,2361.89 273.08,2354.92 P_IN.20@567.09,2354.92
DataIn17: JP_DATA.21 P_IN.21 | length 330.8
  Top Layer w6: JP_DATA.21@237.52,2342.21 266.11,2342.21 269.14,2339.17 P_IN.21@567.09,2339.17
DataIn18: JP_DATA.22 P_IN.22 | length 329.9
  Top Layer w6: JP_DATA.22@237.52,2322.52 266.11,2322.52 267.01,2323.43 P_IN.22@567.09,2323.43
DataIn19: JP_DATA.23 P_IN.23 | length 331.6
  Top Layer w6: JP_DATA.23@237.52,2302.84 266.11,2302.84 270.95,2307.68 P_IN.23@567.09,2307.68
DataIn20: JP_DATA.24 P_IN.24 | length 333.2
  Top Layer w6: JP_DATA.24@237.52,2283.15 266.11,2283.15 274.89,2291.93 P_IN.24@567.09,2291.93
DataIn21: JP_DATA.26 P_IN.26 | length 336.5
  Top Layer w6: JP_DATA.26@237.52,2243.78 487.01,2243.78 503.66,2260.43 P_IN.26@567.09,2260.43
DataIn22: JP_DATA.27 P_IN.27 | length 338.1
  Top Layer w6: JP_DATA.27@237.52,2224.1 489.59,2224.1 510.18,2244.69 P_IN.27@567.09,2244.68
DataIn23: JP_DATA.28 P_IN.28 | length 339.7
  Top Layer w6: JP_DATA.28@237.52,2204.41 492.18,2204.41 516.71,2228.94 P_IN.28@567.09,2228.94
DataIn24: JP_DATA.29 P_IN.29 | length 341.4
  Top Layer w6: JP_DATA.29@237.52,2184.73 494.76,2184.73 523.23,2213.19 P_IN.29@567.09,2213.19
DataIn25: JP_DATA.31 P_IN.31 | length 344.6
  Top Layer w6: JP_DATA.31@237.52,2145.36 476.58,2145.36 512.92,2181.69 P_IN.31@567.09,2181.69
DataIn26: JP_DATA.32 P_IN.32 | length 346.3
  Top Layer w6: JP_DATA.32@237.52,2125.67 479.17,2125.67 519.44,2165.95 P_IN.32@567.09,2165.94
DataIn27: JP_DATA.33 P_IN.33 | length 347.9
  Top Layer w6: JP_DATA.33@237.52,2105.99 481.75,2105.99 525.97,2150.2 P_IN.33@567.09,2150.2
DataIn28: JP_DATA.34 P_IN.34 | length 349.5
  Top Layer w6: JP_DATA.34@237.52,2086.3 484.34,2086.3 532.49,2134.45 P_IN.34@567.09,2134.45
DataIn29: JP_DATA.36 P_IN.36 | length 352.8
  Top Layer w6: JP_DATA.36@237.52,2046.93 472.16,2046.93 528.18,2102.95 P_IN.36@567.09,2102.95
DataIn30: JP_DATA.37 P_IN.37 | length 354.4
  Top Layer w6: JP_DATA.37@237.52,2027.24 474.74,2027.24 534.7,2087.21 P_IN.37@567.09,2087.2
DataIn31: JP_DATA.38 P_IN.38 | length 356
  Top Layer w6: JP_DATA.38@237.52,2007.56 477.33,2007.56 541.23,2071.46 P_IN.38@567.09,2071.46
DataIn32: JP_DATA.39 P_IN.39 | length 357.7
  Top Layer w6: JP_DATA.39@237.52,1987.87 479.91,1987.87 547.75,2055.71 P_IN.39@567.09,2055.71